# EAGLE board Amplificator Cioc Amelia 4cm (EAGLE 9.6.2)
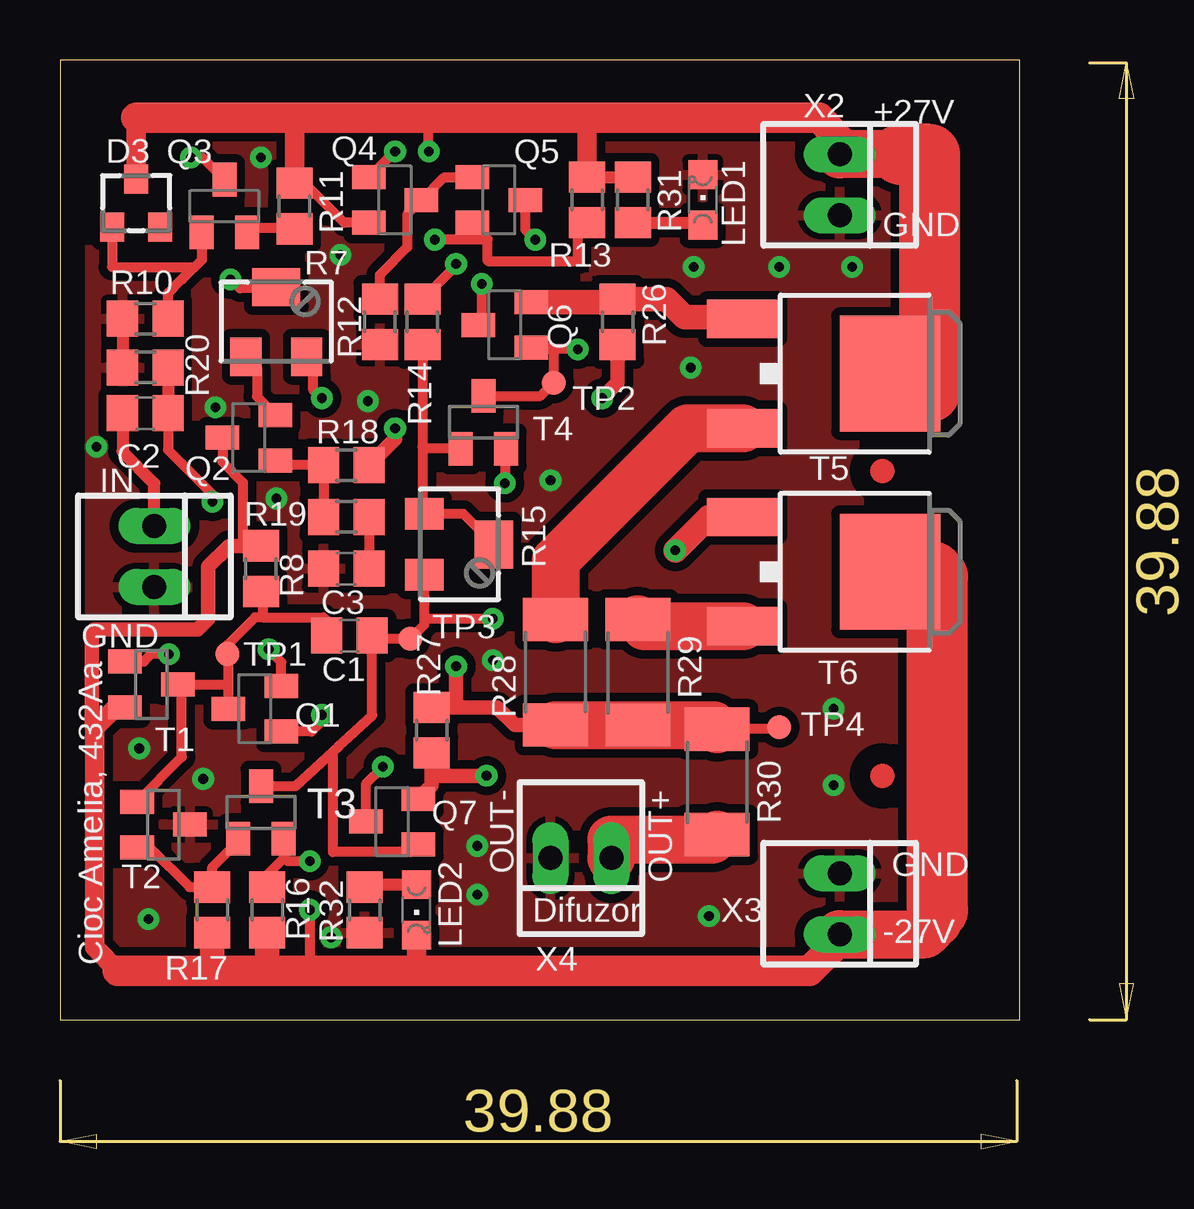
[diagram p0: board, top side]
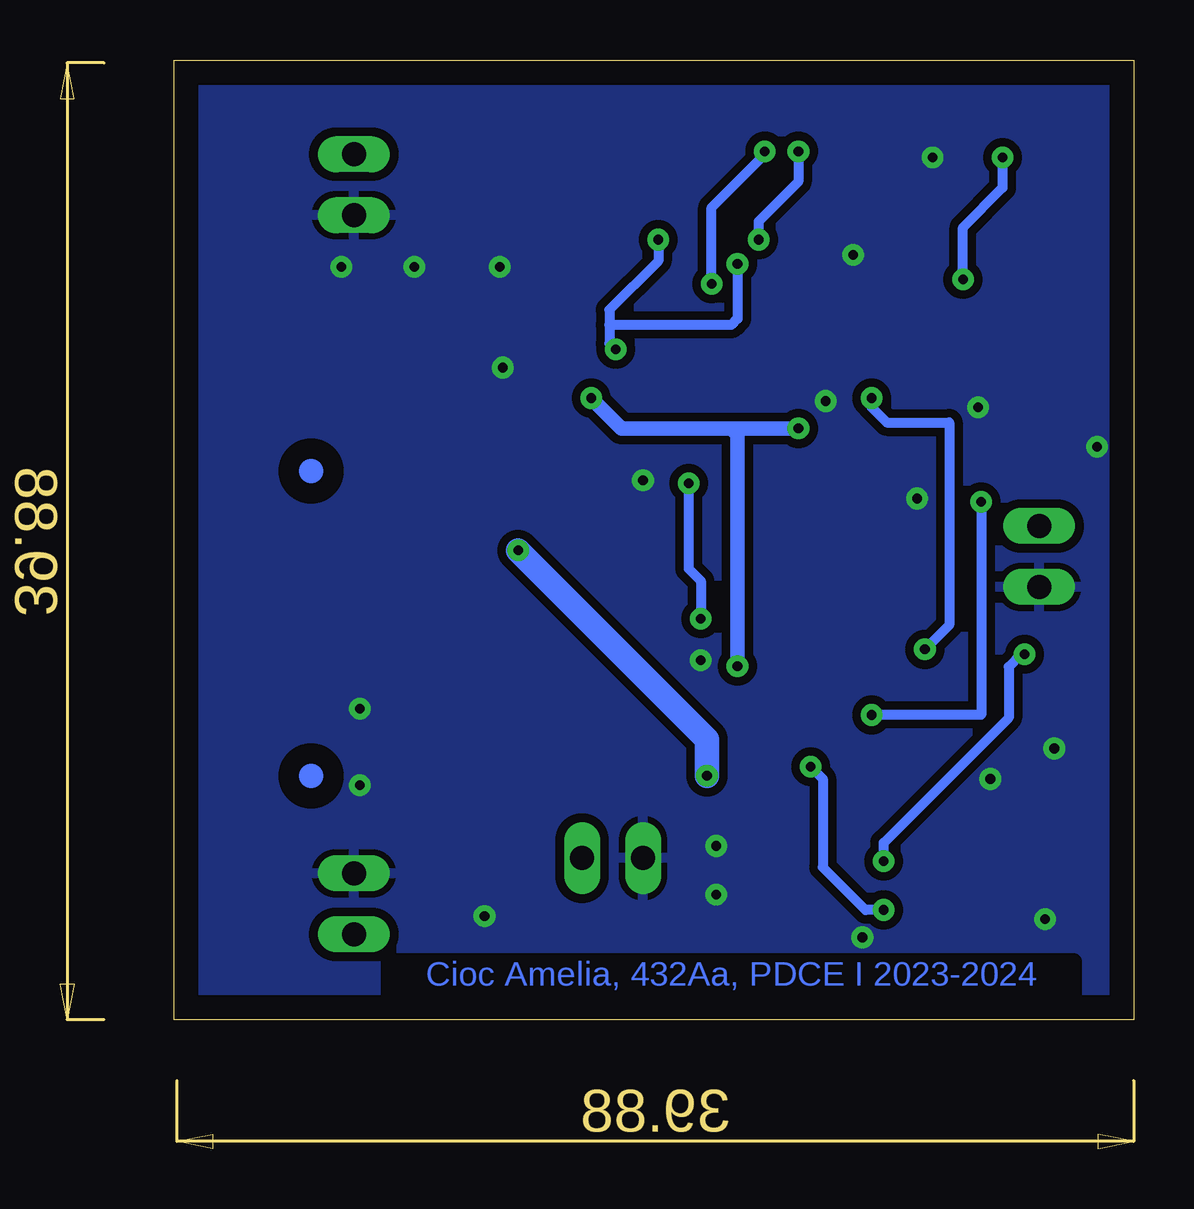
[diagram p1: board, bottom side, seen from below]

Size 40 x 40 mm. Coordinates in mm from the lower left corner, seen from the top.
Outline: 0,0 40,0 40,40 0,40 0,0
Copper layers (1*16): Top 0.035mm / dielectric 0.15mm / Bottom 0.035mm
Design rules "default *": minimum track width 6mil, minimum drill 0.35mm, track to track 6mil, track to pad 6mil, pad to pad 6mil, via to via 6mil, smd to smd 6mil, copper to edge 40mil, drill to drill 6mil, minimum pad ring 10mil, minimum via ring 8mil, stop-mask expansion 4mil, vias tented up to drill 0mil, thermal gap 10mil
Net classes: 0 default: clearance 0.205 mm

## Footprints (pad centres in the part's own frame; a part is rotated, then mirrored left to right if it is on the bottom)
C0805 = smd 1.3 x 1.5: 1 -0.95,0; 2 0.95,0
TO236 = smd 1 x 1.2: A -1,-1; C 0,1; NC 1,-1
22-23-2021 = drill 1 long: 1 -1.27,0; 2 1.27,0
CHIPLED_0805 = smd 1.2 x 1.2: A 0,-1.05; C 0,1.05
SOT23-BEC = smd 1 x 1.4: B -0.95,-1.1; C 0,1.1; E 0.95,-1.1
SM-42/43W = smd 1.3 x 1.6: 1 -1.27,-1.45; 3 1.27,-1.45 | smd 2 x 1.6: 2 0,1.45
R0805 = smd 1.3 x 1.5: 1 -0.95,0; 2 0.95,0
R2010 = smd 1.8 x 2.7: 1 -2.2,0; 2 2.2,0
SOT23 = smd 1 x 1.4: 1 -0.95,-1.1; 2 0.95,-1.1; 3 0,1.1
DPAK = smd 1.6 x 3: 1 -2.28,-4.04; 3 2.28,-4.04 | smd 4.826 x 4.191: 4 0,2.096
TP10R = smd 1 x 1: TP 0,0

## Placement (x,y rotation side)
C1  10p  [C0805]  12.06,16 0 top
C2  10uF  [C0805]  3.56,25.27 0 top
C3  10uF  [C0805]  11.94,18.8 180 top
D3  BZX84CSMD  [TO236]  3.17,34.04 0 top
FIDUCIAL1  [CIRCLE-1MM-2R]  34.29,22.86 0 top
FIDUCIAL2  [CIRCLE-1MM-2R]  34.29,10.16 0 top
IN  22-23-2021  [22-23-2021]  3.94,19.3 270 top
LED1  [CHIPLED_0805]  26.8,34.16 0 top
LED2  [CHIPLED_0805]  14.86,4.57 180 top
Q1  BC856ASMD  [SOT23-BEC]  8.13,12.95 90 top
Q2  BC856ASMD  [SOT23-BEC]  7.87,24.26 90 top
Q3  BC856ASMD  [SOT23-BEC]  6.86,33.91 0 top
Q4  BC856ASMD  [SOT23-BEC]  13.97,34.16 270 top
Q5  BC856ASMD  [SOT23-BEC]  18.29,34.16 270 top
Q6  BC817-16LT1SMD  [SOT23-BEC]  18.54,28.96 90 top
Q7  BC807-16LT1SMD  [SOT23-BEC]  13.84,8.26 90 top
R7  1K  [SM-42/43W]  9.02,29.08 0 top
R8  3.9K  [R0805]  8.38,18.8 270 top
R10  22K  [R0805]  3.56,29.21 0 top
R11  6.8K  [R0805]  9.78,33.91 90 top
R12  22K  [R0805]  13.34,29.08 90 top
R13  68  [R0805]  21.97,34.16 90 top
R14  2.2K  [R0805]  15.11,29.08 90 top
R15  2K  [SM-42/43W]  16.64,19.81 270 top
R16  33  [R0805]  8.64,4.57 90 top
R17  510  [R0805]  6.35,4.57 90 top
R18  6.8K  [R0805]  11.94,23.11 0 top
R19  1K  [R0805]  11.94,20.95 180 top
R20  47K  [R0805]  3.56,27.18 0 top
R26  51  [R0805]  23.24,29.08 90 top
R27  51  [R0805]  15.49,12.06 90 top
R28  0.47  [R2010]  20.66,14.48 90 top
R29  0.47  [R2010]  24.09,14.48 270 top
R30  0.1  [R2010]  27.39,9.91 270 top
R31  1.5k  [R0805]  23.88,34.16 90 top
R32  1.5K  [R0805]  12.7,4.57 270 top
T1  BC846  [SOT23]  3.81,13.97 270 top
T2  BC846  [SOT23]  4.32,8.13 270 top
T3  BC846  [SOT23]  8.38,8.64 0 top
T4  BC846  [SOT23]  17.65,24.89 0 top
T5  MJD31C  [DPAK]  32.5,26.92 270 top
T6  MJD32C  [DPAK]  32.5,18.67 270 top
TP1  TPTP10R  [TP10R]  6.99,15.24 0 top
TP2  TPTP10R  [TP10R]  20.57,26.54 0 top
TP3  TPTP10R  [TP10R]  14.61,15.88 0 top
TP4  TPTP10R  [TP10R]  29.97,12.19 0 top
X2  22-23-2021  [22-23-2021]  32.5,34.8 270 top
X3  22-23-2021  [22-23-2021]  32.5,4.83 270 top
X4  22-23-2021  [22-23-2021]  21.72,6.73 180 top

## Library data of the parts
C1-C3 = rcl; SPICEPREFIX: C
D3 = diode
FIDUCIAL1 FIDUCIAL2 = fiducial
IN X2-X4 = con-molex; MF: MOLEX; MPN: 22-23-2021; OC_FARNELL: 1462926; OC_NEWARK: 25C3832
LED1 LED2 = led
Q1-Q5 Q7 = transistor-pnp
Q6 = transistor-npn
R7 R15 = pot
R8 R10-R14 R16-R20 R26-R32 = rcl; SPICEPREFIX: R
T1-T6 = transistor
TP1-TP4 = testpad

## Nets
GND: C3.2 IN.2 LED1.C R10.1 R12.1 R20.1 R32.2 T2.3 X2.2 X3.1 X4.2
N$1: D3.A Q3.B R10.2
N$2: Q3.E R11.1
N$3: C2.2 Q1.B R20.2
N$4: C1.1 Q1.C R8.2 T1.3 T2.1 TP1.TP
N$5: Q1.E R7.3
N$6: Q2.E R7.1
N$7: Q3.C R7.2
N$8: LED1.A R31.1
N$9: Q2.B R18.1 R19.2
N$10: C3.1 R19.1
N$11: R16.2 T1.1 T3.2
N$12: Q7.E R27.1 T6.1
N$13: C1.2 Q7.B R15.3 T3.3 T4.2 TP3.TP
N$14: R17.2 T2.2 T3.1
N$15: Q5.C Q6.B R14.2 T4.3 TP2.TP
N$16: Q4.C Q5.B R12.2
N$17: R14.1 R15.1 R15.2 T4.1
N$18: R18.2 R26.1 R27.2 R28.1 R29.2 R30.1 TP4.TP
N$19: Q6.E R26.2 T5.1
N$21: R29.1 T6.3
N$22: R28.2 T5.3
N$23: LED2.A R32.1
N$24: Q4.B Q5.E R13.1
N$25: C2.1 IN.1
OUT+: R30.2 X4.1
V+: D3.C Q4.E Q6.C R11.2 R13.2 R31.2 T5.4 X2.1
V-: LED2.C Q2.C Q7.C R8.1 R16.1 R17.1 T1.2 T6.4 X3.2

## Tracks (layer width: path | path; a pad name or v marks a point on that pad's centre or on a via)
GND  (via drill 0.4 pad 0.9)
  Top 0.508: R10.1 R20.1 | LED1.C 26.83,35.18
  other vias: 6.48,25.53 11.68,31.88 8.38,35.94 3.3,11.3 3.68,4.19 9.02,21.72 1.52,23.88 18.03,14.99 27.05,4.32 33.02,31.37 29.97,31.37 26.42,31.37 26.29,27.18 32.26,12.95 17.4,5.21 32.26,9.78 17.4,7.24 12.83,25.78 20.45,22.48 5.97,10.03 11.3,3.43
  pour Top (isolate 0.356): 0,40 0,0 40,0 40,40
  pour Bottom (isolate 0.356): 0,40 0,0 40,0 40,40
N$1
  Top 0.406: D3.A 2.17,31.37 5.59,31.37 5.08,30.86 | Q3.B 5.91,31.67 5.1,30.86 5.08,30.86 | 5.08,30.86 4.51,30.29 R10.2
N$2
  Top 0.406: R11.1 9.84,33.02 8.02,33.02 Q3.E
N$3  (via drill 0.4 pad 0.9)
  Top 0.406: C2.2 4.51,23.75 6.35,21.91 v6.35,21.59 | v10.92,12.7 10.92,12.45 10.48,12 Q1.B
  Top 0.508: R20.2 C2.2
  Bottom 0.406: v6.35,21.59 6.35,12.7 v10.92,12.7
N$4
  Top 0.406: Q1.C 7.03,13.97 | 7.03,13.97 7.03,15.2 TP1.TP 6.99,15.62 8.13,16.76 8.45,16.76 | T1.3 5.08,13.97 | 5.08,13.97 7.03,13.97 | T2.1 5.08,10.94 5.08,13.97 | 8.45,16.76 8.45,18.22 8.38,18.29 R8.2 | C1.1 11.12,16.64 10.99,16.76 8.45,16.76
N$5  (via drill 0.4 pad 0.9)
  Top 0.406: Q1.E 9.23,14.9 v8.7,15.43 | v10.92,25.91 10.54,26.29 10.54,27.38 R7.3
  Bottom 0.406: v8.7,15.43 7.68,16.45 7.68,24.89 10.29,24.89 10.92,25.53 v10.92,25.91
N$6
  Top 0.406: Q2.E 8.21,25.97 8.21,27.17 R7.1
N$7  (via drill 0.4 pad 0.9)
  Top 0.406: R7.2 8.96,30.48 7.49,30.48 v7.11,30.86 | v5.46,35.94 5.93,35.94 Q3.C
  Bottom 0.406: v7.11,30.86 7.11,33.02 5.46,34.67 v5.46,35.94
N$8
  Top 0.508: R31.1 26.79,33.21 LED1.A
N$9
  Top 0.406: R19.2 R18.1 9.17,23.11 Q2.B
N$10
  Top 0.406: R19.1 C3.1
N$11  (via drill 0.4 pad 0.9)
  Top 0.406: T1.1 3.49,14.92 3.81,15.24 v4.55,15.24 | R16.2 8.64,6.03 9.33,6.73 T3.2 9.33,6.77 9.5,6.6 v10.41,6.6
  Bottom 0.406: v4.55,15.24 4.67,15.24 5.2,14.71 5.2,12.58 10.41,7.37 v10.41,6.6
N$12  (via drill 0.4 pad 0.9)
  Top 0.61: Q7.E 15.49,9.76 15.49,10.16 | R27.1 15.49,10.16 | 15.49,10.16 v17.78,10.16
  Top 1.016: T6.1 27.05,20.95 v25.65,19.56
  Bottom 1.016: v17.78,10.16 17.78,11.68 v25.65,19.56
N$13  (via drill 0.4 pad 0.9)
  Top 0.406: 11.38,11.18 11.63,11.41 11.8,11.57 13.02,12.69 C1.2 13.14,15.88 TP3.TP 15.19,16.46 15.19,16.76 | 11.38,11.18 9.82,9.74 T3.3 | Q7.B 14.93,7.3 14.61,6.99 11.38,6.99 11.38,11.18 | R15.3 15.19,16.76 | T4.2 18.54,23.73 v18.54,22.35 | v18.03,16.7 15.24,16.7 15.19,16.76
  Bottom 0.406: v18.54,22.35 18.54,18.8 18.03,18.29 v18.03,16.7
N$14
  Top 0.406: T2.2 3.74,7.18 5.4,5.52 R17.2 6.35,6.35 7.43,7.43 T3.1
N$15  (via drill 0.4 pad 0.9)
  Top 0.406: T4.3 20.02,25.99 TP2.TP 20.57,27.94 20.51,28.01 Q6.B 19.71,27.94 v21.59,27.94 | Q5.C 19.39,32.94 v19.81,32.51 | R14.2 16.51,31.43 v16.51,31.5
  Bottom 0.406: v19.81,32.51 19.81,31.62 21.84,29.59 21.84,28.96 | 21.84,28.96 21.84,28.19 v21.59,27.94 | v16.51,31.5 16.51,29.21 16.76,28.96 21.84,28.96
N$16
  Top 0.406: Q5.B 16.02,35.11 Q4.C 14.48,33.57 14.48,32.19 13.34,31.05 R12.2
N$17
  Top 0.406: R15.2 16.82,21.08 R15.1 15.11,21.16 15.11,23.88 | R14.1 15.11,23.88 | T4.1 15.2,23.79 15.11,23.88
N$18  (via drill 0.4 pad 0.9)
  Top 0.406: TP4.TP 29.89,12.11 R30.1
  Top 0.61: R27.2 16.51,13.02 | 16.51,13.02 18.23,13.02 18.96,12.28 R28.1 | R26.1 23.24,26.54 v22.61,25.91 | v16.51,14.73 16.51,13.02 | R18.2 13.97,24.2 v13.97,24.64
  Top 2: R28.1 R29.2 27.22,12.28 R30.1
  Bottom 0.61: v22.61,25.91 21.34,24.64 16.76,24.64 | 16.76,24.64 16.51,24.38 v16.51,14.73 | v13.97,24.64 16.76,24.64
N$19
  Top 1.016: T5.1 28.89,29.2 29.01,29.27 26.67,29.27 26.04,29.27 25.27,30.03 R26.2 23.11,29.91 Q6.E
N$21
  Top 2: T6.3 24.38,16.39 R29.1
N$22
  Top 2: T5.3 26.16,24.64 20.66,19.14 R28.2
N$23
  Top 0.508: R32.1 12.8,5.62 LED2.A
N$24  (via drill 0.4 pad 0.9)
  Top 0.406: R13.1 21.59,32.83 21.59,31.62 17.82,31.62 17.82,32.51 17.19,32.51 | 17.19,32.51 Q5.E | 17.19,32.51 v15.62,32.51 | v13.97,36.2 12.89,35.11 Q4.B
  Bottom 0.406: v15.62,32.51 15.62,33.27 13.97,34.92 v13.97,36.2
N$25
  Top 0.508: C2.1 2.61,23.68 3.94,22.35 IN.1
OUT+
  Top 2: R30.2 27.18,7.49 22.99,7.49 X4.1
V+  (via drill 0.4 pad 0.9)
  Top 0.406: Q4.E 11.85,33.21 10.21,34.86 R11.2 | Q6.C 17.44,29.25 17.59,29.4 v17.59,30.67 | v15.37,36.2 15.37,37.59
  Top 0.508: R13.2 R31.2
  Top 0.813: D3.C 3.17,37.59 | 9.78,37.59 R11.2 | R13.2 21.97,37.59
  Top 1.27: 3.17,37.59 9.78,37.59 15.37,37.59 21.97,37.59 31.65,37.59 32.5,36.65 X2.1
  Top 2: 35.05,36.07 X2.1
  Top 2.54: T5.4 35.36,26.16 36.26,26.16 36.26,36.07 35.05,36.07
  Bottom 0.406: v17.59,30.67 17.59,33.85 15.37,36.07 v15.37,36.2
V-  (via drill 0.4 pad 0.9)
  Top 0.406: Q2.C 6.77,23.24 7.62,22.39 7.62,19.75 R8.1 | v13.46,10.54 12.74,9.82 Q7.C | v10.41,4.57 10.41,2.03
  Top 0.61: R8.1 7.05,19.75 6.18,18.88 6.18,16.71 5.73,16.26 1.42,16.26 1.32,16.15 1.32,12.38 1.44,12.26 1.5,12.19
  Top 0.813: T1.2 2.33,13.02 1.5,12.19 | 1.44,12.26 1.44,3 2.41,2.03 | 14.73,2.03 14.86,2.16 LED2.C
  Top 1.016: R17.1 6.35,2.03 | R16.1 8.64,2.03
  Top 1.27: 2.41,2.03 6.35,2.03 8.64,2.03 10.41,2.03 14.73,2.03 31.24,2.03 32.5,3.29 X3.2
  Top 2: X3.2 36.07,3.56 36.58,4.06 36.58,4.57
  Top 2.54: T6.4 36.37,18.67 36.58,18.47 36.58,4.57
  Bottom 0.406: v13.46,10.54 12.95,10.03 12.95,6.35 11.18,4.57 v10.41,4.57

## Text on the board
Bottom: Cioc Amelia, 432Aa, PDCE I 2023-2024
tNames: +27V | GND | GND | OUT- | OUT+ | GND | Difuzor | -27V | Cioc Amelia, 432Aa
tValues: Cioc Amelia, 432Aa PDCE I 2023-2024
DrillLegend: LAYER-STACK
DrillLegend_01-16: 01-16